# Altium PCB tinySniff.PcbDoc
Units mil, origin at the board's own origin, x right, y up, seen from the top; angles counter-clockwise.
Board outline 1900.96 x 1900.96 mil, 2 copper layers (Top Copper, Bottom Copper), stack 44.685 mil thick; 27 components, 11 nets, 102 pads, 21 vias.
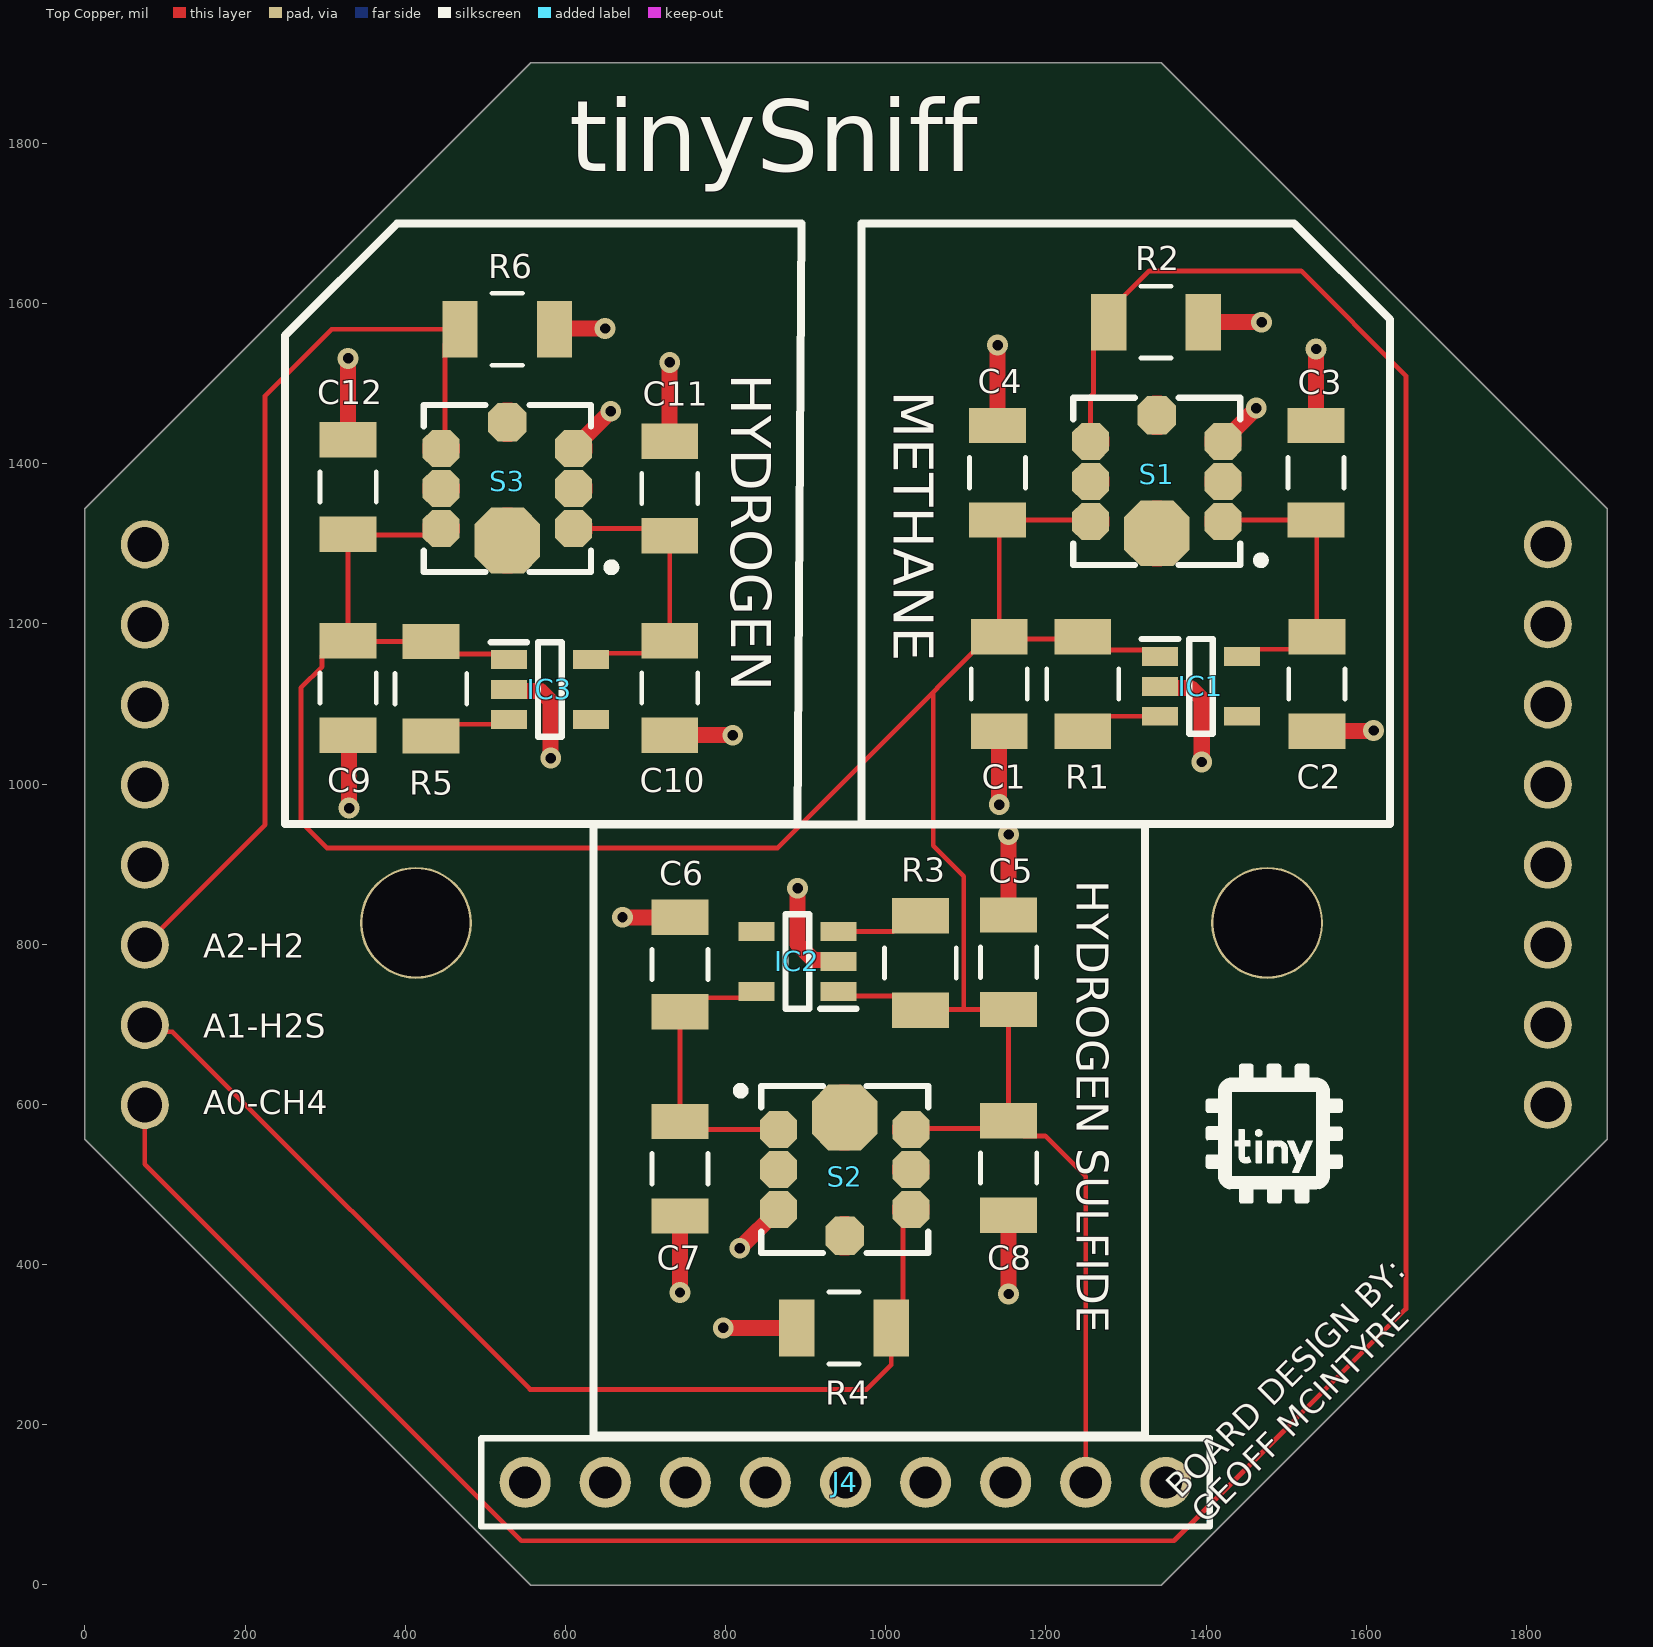
[diagram p0: Top Copper view]
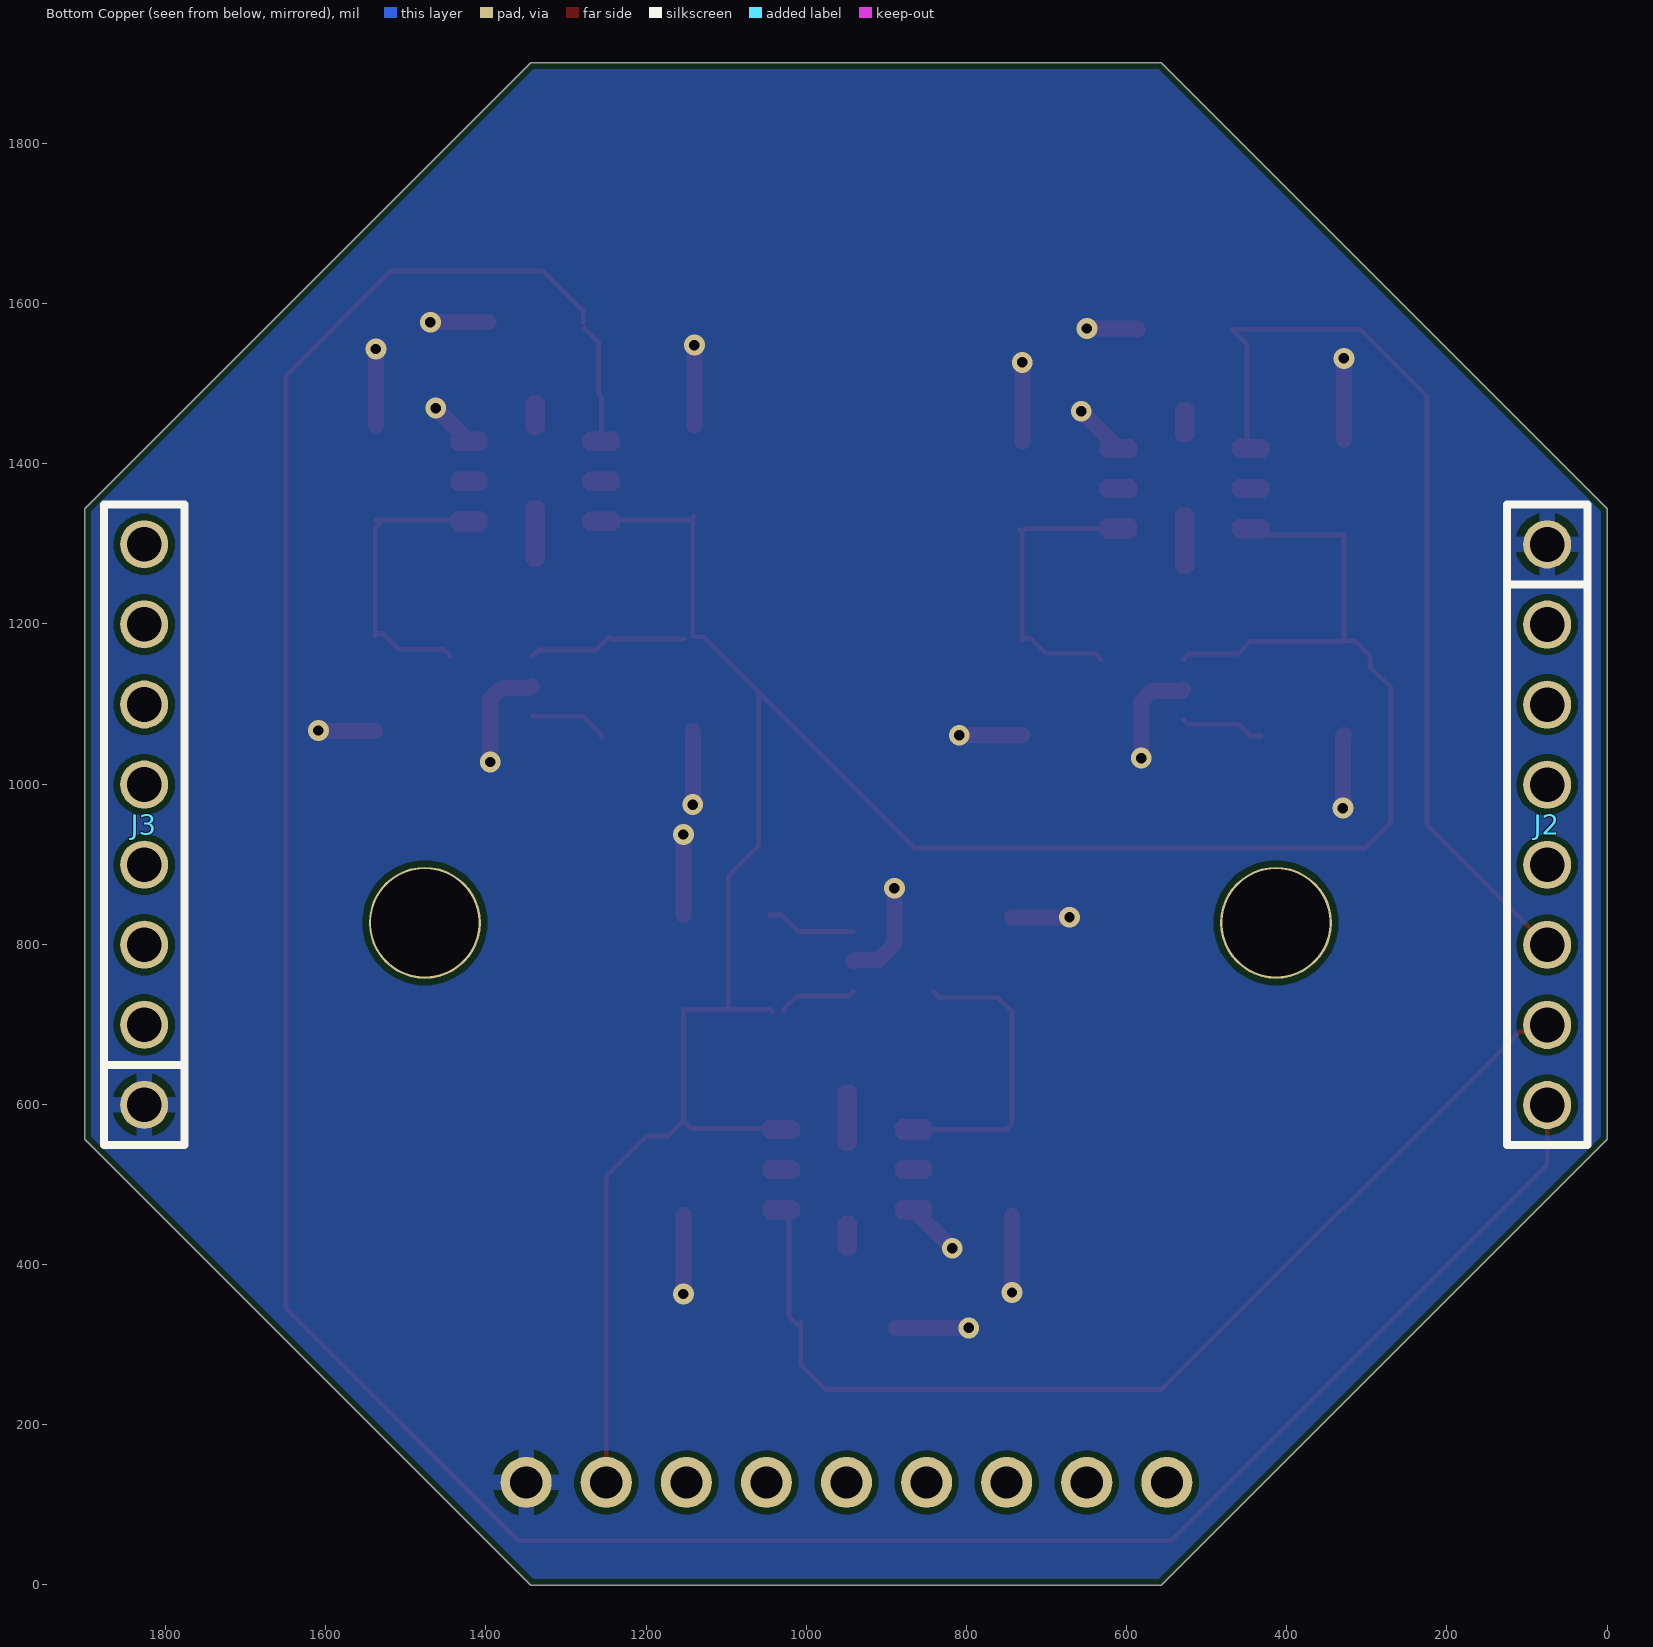
[diagram p1: Bottom Copper view, seen from below]
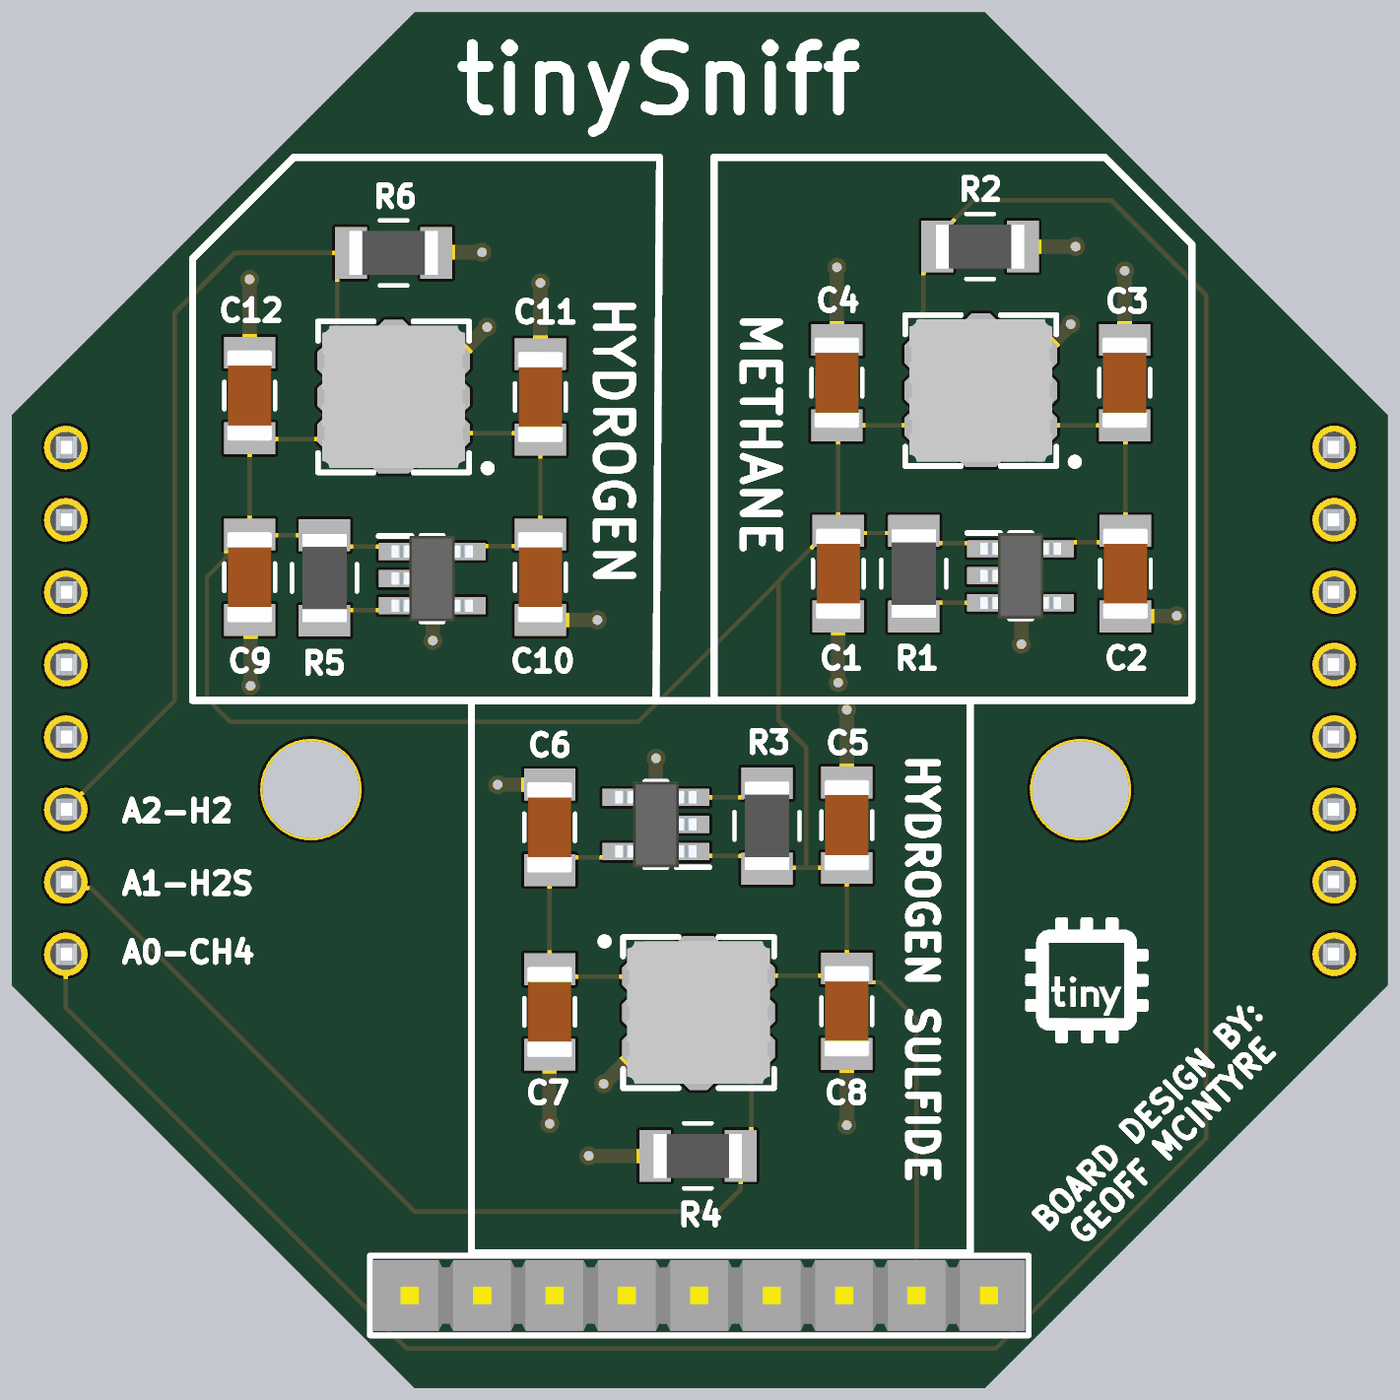
[diagram p2: 3D render of the assembled board from above, using the file's embedded part models]

## Layer stack, top to bottom
Top Mask: solder mask 0.5906, Solder Resist, Dk 3.8
Top Copper: signal copper 1.378
Core: core 41.9291, FR-4, Dk 4.5
Bottom Copper: signal copper 1.378
Bottom Mask: solder mask 0.5906, Solder Resist, Dk 3.8

## Board outline
-0.04,556.44 -0.04,1343.85 556.74,1900.62 1344.14,1900.62 1900.92,1343.85 1900.92,556.44 1344.14,-0.33 556.74,-0.33

## Design rules (kind name [scope] priority, off if disabled: settings)
BoardOutlineClearance [All] p1: gap=7.87 ignorepadtopadclearanceinfootprint=FALSE except(15.75: Arc-SplitBarrior Arc-SplitContinuation Track-SplitBarrior Track-SplitContinuation SMDPad-SplitBarrior SMDPad-SplitContinuation THPad-SplitBarrior THPad-SplitContinuation Via-SplitBarrior Via-SplitContinuation Fill-SplitBarrior Fill-SplitContinuation Poly-SplitBarrior Poly-SplitContinuation Region-SplitBarrior Region-SplitContinuation Text-SplitBarrior Text-SplitContinuation)
Clearance "Clearance Bottom Layer" [OnLayer('Bottom Layer')] p1: gap=8 ignorepadtopadclearanceinfootprint=TRUE except(10: Arc-Text Track-Text SMDPad-Text THPad-Text Via-Text Fill-Text Poly-Text Region-Text Text-Text)
Clearance "Clearance Top Layer" [OnLayer('Top Layer')] p2: gap=8 ignorepadtopadclearanceinfootprint=TRUE except(10: Arc-Text Track-Text SMDPad-Text THPad-Text Via-Text Fill-Text Poly-Text Region-Text Text-Text)
Clearance [All] p3: gap=7.87 ignorepadtopadclearanceinfootprint=FALSE except(3.5: Arc-Arc Arc-Track Arc-SMDPad Track-Track Track-SMDPad SMDPad-SMDPad; 5: Arc-Via Track-Via SMDPad-Via THPad-Via Via-Via; 10: Arc-Text Track-Text SMDPad-Text THPad-Text Via-Text Fill-Text Poly-Text Region-Text Text-Text)
HoleSize [All] p1: absolutevalues=TRUE maxlimit=248.03 minlimit=7.87 maxpercent=80.000 minpercent=20.000
MinimumAnnularRing [All] p1: minimumring=3
MinimumSolderMaskSliver [All] p1: minsoldermaskwidth=3.94
PolygonConnect PolygonConnect_1 [All] p1: thpad.connectstyle=Relief thpad.reliefconductorwidth=20 thpad.reliefentries=4 thpad.polygonreliefangle="90 Angle" thpad.airgapwidth=10 smdpad.connectstyle=Relief smdpad.reliefconductorwidth=20 smdpad.reliefentries=4 smdpad.polygonreliefangle="90 Angle" smdpad.airgapwidth=10 via.connectstyle=Direct via.reliefconductorwidth=20 via.reliefentries=4 via.polygonreliefangle="90 Angle" via.airgapwidth=10
RoutingCorners [All] p1: cornerstyle=Round minsetback=100 maxsetback=100
RoutingVias [All] p1: holewidth=13 width=26 viastyle="Through Hole" minholewidth=13 minwidth=26 maxholewidth=13 maxwidth=26
SilkToSilkClearance [All] p1: silktosilkclearance=3.94
SilkToSolderMaskClearance [IsPad] p1: minsilkscreentomaskgap=3.94 clearancetoexposedcopper=TRUE
SolderMaskExpansion SolderMaskExpansion_Via [IsVia] p1: expansion=4 istentingtop=TRUE
SolderMaskExpansion [All] p2: expansion=4 istentingtop=FALSE
SupplyNets "Schematic Supply Nets_5" [InNet('1.8V')] p1: voltage=0.000
SupplyNets "Schematic Supply Nets_3" [InNet('2.6V')] p2: voltage=0.000
SupplyNets "Schematic Supply Nets_2" [InNet('2.5V')] p3: voltage=0.000
SupplyNets "Schematic Supply Nets_1" [InNet('VCC')] p4: voltage=0.000
SupplyNets "Schematic Supply Nets_4" [InNet('GND')] p5: voltage=0.000
Width IMP [InNetClass('IMP')] p1: maxlimit=20 minlimit=10 preferedwidth=20 minimp=50.000000 maximp=50.000000 favimp=50.000000
Width [All] p2: maxlimit=100 minlimit=3.5 preferedwidth=6 minimp=50.000000 maximp=50.000000 favimp=50.000000
25 further rules are at their usual default settings.

## Components (designator, comment, footprint, x,y, rotation, side; value= is the part's Value field where it differs from the comment)
C1 "1uF" 1206_Passive_Capacitor 1141.73,1125 r90 top
C2 "1uF" 1206_Passive_Capacitor 1538.39,1125 r90 top
C3 "100nF" 1206_Passive_Capacitor 1537.4,1388.78 r270 top
C4 "100nF" 1206_Passive_Capacitor 1139.76,1388.78 r90 top
C5 "1uF" 1206_Passive_Capacitor 1153.54,777.56 r270 top
C6 "1uF" 1206_Passive_Capacitor 743.11,774.61 r270 top
C7 "100nF" 1206_Passive_Capacitor 743.11,519.69 r90 top
C8 "100nF" 1206_Passive_Capacitor 1153.54,520.67 r270 top
C9 "1uF" 1206_Passive_Capacitor 328.74,1120.08 r90 top
C10 "1uF" 1206_Passive_Capacitor 730.31,1120.08 r90 top
C11 "100nF" 1206_Passive_Capacitor 730.31,1369.09 r270 top
C12 "100nF" 1206_Passive_Capacitor 328.74,1371.06 r90 top
IC1 "AP2112K-2.6TRG1" SOT95P285X140-5N 1393.7,1122.05 r0 top
IC2 "AP2112K-1.8TRG1" SOT95P285X140-5N 889.76,778.54 r180 top
IC3 "AP2112K-2.5TRG1" SOT95P285X140-5N 580.71,1118.11 r0 top
J2 "PPTC081LFBN-RC" "8_PIN_100MIL - Female" 74.8,1299.21 r270 bottom locked
J3 "PPTC081LFBN-RC" "8_PIN_100MIL - Female" 1826.77,599.41 r90 bottom locked
J4 "HTSW-109-07-X-SJ" JM-9_HTSW-109-07-X-S 949.8,127.95 r0 top
R1 "100KOhm" 1206_Passive_Resitor 1246.06,1125 r270 top
R2 "4.7KOhm" 1206_Passive_Resitor 1337.6,1576.77 r0 top
R3 "100KOhm" 1206_Passive_Resitor 1043.31,776.57 r90 top
R4 "4.7KOhm" 1206_Passive_Resitor 947.83,320.87 r180 top
R5 "100KOhm" 1206_Passive_Resitor 432.09,1119.09 r270 top
R6 "4.7KOhm" 1206_Passive_Resitor 527.56,1567.91 r0 top
S1 "GM-402B" QFN127P500X500X155_HS-9N 1338.58,1377.95 r180 top
S2 "GM-602B" QFN127P500X500X155_HS-9N 948.82,518.7 r0 top
S3 "GMV-2021B" QFN127P500X500X155_HS-9N 527.56,1369.09 r180 top

## Footprints (in the part's own frame and the unit in brackets; to place one, negate y for a bottom-side part, rotate by r counter-clockwise, add the part's x,y. Pads: shape width x height; smd on the part's side, far side on the other; paste and mask are expansions set on the pad)
"8_PIN_100MIL - Female" [mil]
  round 60 hole 43.31: 1(0,0) 2(100,0) 3(200,0) 4(300,0) 5(400,0) 6(500,0) 7(600,0) 8(700,0)
  silkscreen extent -50,-50 750,50, body extent -60,-51 760,49, height 335
1206_Passive_Capacitor [mil]
  rect 44x71 smd: 1(-59,0) 2(59,0)
  silkscreen extent -19,-35 19,35, body extent -63,-31 63,32, height 50
1206_Passive_Resitor [mil]
  rect 44x71 smd: 1(-59,0) 2(59,0)
  silkscreen extent -19,-45 19,45, body extent -61,-31 61,31, height 26
JM-9_HTSW-109-07-X-S [mm]
  round 1.62 hole 1.02: 1(-10.16,0) 2(-7.62,0) 3(-5.08,0) 4(-2.54,0) 5(0,0) 6(2.54,0) 7(5.08,0) 8(7.62,0) 9(10.16,0)
  silkscreen extent -11.56,-1.4 11.56,1.4, body extent -11.43,-1.24 11.43,1.24, height 8.38
QFN127P500X500X155_HS-9N [mm] "QFN, 8-Leads, Body 5.00x5.00mm, Pitch 1.27mm, Thermal Pad 4.00x3.18mm, IPC Medium Density"
  oct 1.17x1.17 smd: 1(2.1,1.27) 2(2.1,0) 3(2.1,-1.27) 5(-2.1,-1.27) 6(-2.1,0) 7(-2.1,1.27)
  oct 1.23x1.23 smd: 4(0,-2.1)
  oct 2.08x2.08 smd: 8(0,1.65)
  Top Copper region: -0.3,0.76 -0.15,0.61 0.15,0.61 0.3,0.76 0.3,2.54 0.15,2.69 -0.15,2.69 -0.3,2.54
  Top Copper region: 2.535,0.97 2.685,1.12 2.685,1.42 2.535,1.57 1.665,1.57 1.515,1.42 1.515,1.12 1.665,0.97
  Top Copper region: 2.535,-0.3 2.685,-0.15 2.685,0.15 2.535,0.3 1.665,0.3 1.515,0.15 1.515,-0.15 1.665,-0.3
  Top Copper region: 2.535,-1.57 2.685,-1.42 2.685,-1.12 2.535,-0.97 1.665,-0.97 1.515,-1.12 1.515,-1.42 1.665,-1.57
  Top Copper region: -0.3,-2.565 -0.15,-2.715 0.15,-2.715 0.3,-2.565 0.3,-1.635 0.15,-1.485 -0.15,-1.485 -0.3,-1.635
  Top Copper region: -1.665,-1.57 -1.515,-1.42 -1.515,-1.12 -1.665,-0.97 -2.535,-0.97 -2.685,-1.12 -2.685,-1.42 -2.535,-1.57
  Top Copper region: -1.665,-0.3 -1.515,-0.15 -1.515,0.15 -1.665,0.3 -2.535,0.3 -2.685,0.15 -2.685,-0.15 -2.535,-0.3
  Top Copper region: -1.675,0.95 -1.515,1.11 -1.515,1.43 -1.675,1.59 -2.525,1.59 -2.685,1.43 -2.685,1.11 -2.525,0.95
  silkscreen extent -3.43,-2.65 2.65,2.65, body extent -2.5,-2.5 2.5,2.5, height 1.85
SOT95P285X140-5N [mm]
  rect 1.15x0.6 smd: 1(-1.3,0.95) 2(-1.3,0) 3(-1.3,-0.95) 4(1.3,-0.95) 5(1.3,0.95)
  silkscreen extent -1.88,-1.5 0.38,1.5, body extent -1.43,-1.5 1.43,1.5, height 1.4

## Part data
C1 C2 C5 C6 C9 C10: library part C_1uF_1206, "MULTILAYER CERAMIC CAPACITORS MLCC - SMD/SMT 1UF 50V 1206 ROHS", LCSC Part#=C1848, MFR Part #=CL31B105KBHNNNE, Digikey Link=https://www.digikey.com/product-detail/en/C1206C105M4RACTU/399-8150-1-ND/3471873/?itemSeq=304982366, Type=Basic
C3 C4 C7 C8 C11 C12: library part C_47nF_1206, "100nF ±5% 50V C0G 1206 Multilayer Ceramic Capacitors MLCC - SMD/SMT RoHS", LCSC Part#=C21812, MFR Part #=GRM31M5C1H473JA01L, Datasheet=https://datasheet.lcsc.com/lcsc/1810201313_Murata-Electronics-GRM31M5C1H473JA01L_C21812.pdf, Type=Extended
IC1 IC3: library part CMP-031-00006-1, "600mA 1.8V LDO Regulator Enable SOT23-5", Arrow Part Number=AP2112K-1.8TRG1, Manufacturer_Name="Diodes Incorporated", Mouser Part Number=621-AP2112K-1.8TRG1, Arrow Price/Stock=https://www.arrow.com/en/products/ap2112k-1.8trg1/diodes-incorporated?region=nac, Datasheet Link=https://www.diodes.com/assets/Datasheets/AP2112.pdf, Design Item ID=AP2112K-1.8TRG1, Height=1.4mm, Manufacturer_Part_Number=AP2112K-1.8TRG1, Mouser Price/Stock=https://www.mouser.co.uk/ProductDetail/Diodes-Incorporated/AP2112K-1.8TRG1?qs=x6A8l6qLYDBx1xhw8AX2cw%3D%3D, Source=SamacSys.SchLib
IC2: library part CMP-031-00006-1, "600mA 1.8V LDO Regulator Enable SOT23-5", Manufacturer_Name="Diodes Incorporated", Mouser Part Number=621-AP2112K-1.8TRG1, Arrow Part Number=AP2112K-1.8TRG1, Arrow Price/Stock=https://www.arrow.com/en/products/ap2112k-1.8trg1/diodes-incorporated?region=nac, Datasheet Link=https://www.diodes.com/assets/Datasheets/AP2112.pdf, Design Item ID=AP2112K-1.8TRG1, Height=1.4mm, Manufacturer_Part_Number=AP2112K-1.8TRG1, Mouser Price/Stock=https://www.mouser.co.uk/ProductDetail/Diodes-Incorporated/AP2112K-1.8TRG1?qs=x6A8l6qLYDBx1xhw8AX2cw%3D%3D, Source=SamacSys.SchLib
J2 J3: library part JF_8_PIN_FEMALE, "8 Position Header Connector 0.100\" (2.54mm) Through Hole Tin", LCSC Part#=C27438, Digikey Link=https://www.digikey.com/product-detail/en/PPTC081LFBN-RC/S7006-ND/810147/?itemSeq=304982354, MFR Part #=PPTC081LFBN-RC, Type=Extended
J4: library part JM_9_PIN_MALE, "2.54mm Black 1x9P Straight,P=2.54mm Pin Headers", LCSC Part#=C2894932, MFR Part #=PZ254-1-09-Z-8.5, MFR PN=HTSW-109-07-X-SJ
R1 R3 R5: library part R_100KOhm_1206, "100kΩ ±1% 0.25W ±100ppm/℃ 1206 Chip Resistor - Surface Mount RoHS", LCSC Part#=C17900, MFR Part #=1206W4F1003T5E, Datasheet=https://datasheet.lcsc.com/lcsc/1810301421_UNI-ROYAL-Uniroyal-Elec-1206W4F1003T5E_C17900.pdf, Type=Basic
R2 R4 R6: library part R_4.7k_1206, "4.7kΩ ±1% 0.25W ±100ppm/℃ 1206 Chip Resistor - Surface Mount RoHS", LCSC Part#=C17936, MFR Part #=1206W4F4701T5E, Datasheet=https://datasheet.lcsc.com/lcsc/1810301414_UNI-ROYAL-Uniroyal-Elec-1206W4F4701T5E_C17936.pdf, Type=Basic
S1 S2 S3: library part CMP-010-00024-1, "Generic MEMS footprint for GM series devices from Winsen"

## Free pads (board coordinates)
  round 139.76 hole 133.86: 2(413.39,826.77) 5(1476.38,826.77)

## Via types
v1: diameter 26, hole 13, Top Copper to Bottom Copper, tented both sides, 21 vias

## Nets (pads, with @x,y where several pads share a name; then routed paths per layer and width w, separated by ;. In a path a pad name is that pad's centre, name@x,y a point inside that pad or via, vN(x,y) a via of type N, cw(c..) or ccw(c..) an arc to the next point about the centre after c; other vN are vias at no path point)
1.8V: C6.2 C7.2 IC2.5 S2.7 | length 371.9
  Top Copper w6: C7.2@743.11,575.79 750.2,568.7 S2.7 ; C7.2 C6.2 760.77,733.27 833.66,733.27 IC2.5@841.54,741.14
2.5V: C10.2 C11.2 IC3.5 S3.7 | length 367.8
  Top Copper w6: S3.7 726.18,1319.09 C11.2@727.36,1317.91 ; S3.7@616.14,1323.82 S3.7@616.14,1327.42 ; IC3.5 639.76,1163.39 701.12,1163.39 719.82,1182.09 C10.2@727.36,1182.09 ; C10.2 C11.2 730.31,1314.96 C11.2@733.27,1317.91
2.6V: C2.2 C3.2 IC1.5 S1.7 | length 368.7
  Top Copper w6: S1.7@1417.32,1329.72 1417.38,1329.78 C3.2 ; IC1.5 1453.69,1168.26 1467.99,1168.26 1468.03,1168.31 1509.19,1168.31 1528.88,1187.99 C2.2@1537.4,1187.99 ; C3.2@1532.48,1325.79 1538.39,1319.88 C2.2
CH4: J2.8 R2.1 S1.3 | length 3739.3
  Top Copper w6: J2.8 74.8,525.2 545,55 1360,55 1649.61,344.61 1649.61,1509.84 1518.7,1640.75 1329.07,1640.75 1278.6,1590.27 R2.1 ; S1.3 1255.91,1484.27 1259.6,1487.96 1259.6,1551.92 R2.1@1277.56,1569.88
GND: C1.1 C2.1 C3.1 C4.2 C5.1 C6.1 C7.1 C8.2 C9.1 C10.1 C11.1 C12.2 IC1.2 IC2.2 IC3.2 J2.1 J3.1 J4.9 R2.2 R4.2 R6.2 S1.5 S2.5 S3.5 | length 1912.5
  Top Copper w20: C9.1 330,1059.82 v1(330,970) ; C12.2 v1(328.74,1531.5) ; IC3.2 531.34,1116.3 568.74,1116.3 581.69,1103.35 v1(581.69,1032.48) ; R6.2 587.54,1568.9 v1(649.61,1568.9) ; S3.5 v1(656.69,1465.55) ; v1(671.39,833.61) C6.1 ; C10.1 v1(809,1061.08) ; C11.1 v1(730.31,1526.57) ; v1(743.11,365.16) C7.1 ; v1(797.24,320.87) R4.2 ; v1(817.72,420.28) S2.5 ; v1(890,870) 890,800 909.65,780.35 939.13,780.35 IC2.2 ; C4.2 v1(1139.76,1548.23) ; v1(1141.73,974.41) C1.1 ; v1(1153.54,363.19) C8.2 ; C5.1 v1(1153.54,937.01) ; IC1.2 1344.33,1120.24 1380.75,1120.24 1394.68,1106.3 v1(1394.68,1027.56) ; R2.2 v1(1469.49,1576.77) ; S1.5 v1(1462.8,1469.49) ; C3.1 v1(1537.4,1543.31) ; C2.1 1538.85,1066.46 1608.79,1066.46 v1(1609.25,1066.93)
H2: J2.6 R6.1 S3.3 | length 1184.2
  Top Copper w6: J2.6@75.79,800.2 225,949.41 225,1484.84 308.07,1567.91 R6.1 449.56,1548.91 449.56,1423.97 S3.3@443.9,1418.31
H2S: J2.7 R4.1 S2.3 | length 1353.7
  Top Copper w6: J2.7 83.39,690.63 109.37,690.63 555.91,244.09 976.38,244.09 1006.89,274.61 R4.1@1006.89,320.92 ; R4.1@1006.89,327.76 R4.1@1006.89,320.92 ; S2.3@1034.45,472.44 1021.65,459.65 1021.65,335.69 R4.1@1006.89,320.92
  Bottom Copper w6: J2.7@77.76,697.83 J2.7@77.76,702.17
NetIC1_3: IC1.3 R1.2 | length 99.9
  Top Copper w6: R1.2@1255.91,1058.07 1255.91,1061.99 1278.56,1084.65 IC1.3
NetIC2_3: IC2.3 R3.2 | length 113.9
  Top Copper w6: IC2.3 1010.18,815.94 1030.85,836.61 R3.2@1046.26,836.61
NetIC3_3: IC3.3 R5.2 | length 106
  Top Copper w6: R5.2 445.59,1060.09 460.3,1074.8 523.62,1074.8 IC3.3
VCC: C1.2 C4.1 C5.2 C8.1 C9.2 C12.1 IC1.1 IC2.1 IC3.1 J4.8 R1.1 R3.1 R5.1 S1.1 S2.1 S3.1 | length 3575.9
  Top Copper w6: C9.2@328.74,1178.09 R5.1 445.59,1178.09 461.28,1162.4 522.64,1162.4 IC3.1 ; C9.2 315.24,1179.08 296.24,1160.08 296.24,1146.63 269.68,1120.08 269.68,952.76 302.17,920.28 865.16,920.28 1059.39,1114.51 ; C9.2@328.74,1179.13 C12.1@328.74,1311.02 ; C12.1 C12.1@328.74,1311.02 ; S3.1 436.81,1311.02 C12.1@328.74,1311.02 ; IC2.1 946.85,735.24 1012.15,735.24 1027.56,719.82 R3.1@1027.56,716.54 ; S2.1@1037.4,569.88 1143.76,569.88 C8.1 ; R3.1@1042.32,715.55 1045.33,718.56 1097.44,718.56 ; 1063.65,1119.42 1128.23,1184 C1.2 C4.1@1141.73,1329.78 ; 1063.98,1119.09 1059.39,1114.51 ; C4.1@1140.75,1334.65 1141.73,1333.66 C4.1@1141.73,1329.78 ; C1.2@1153.54,1181.1 1243.17,1181.1 R1.1 1262.74,1167.32 1334.65,1167.32 IC1.1 ; J4.8@1250,125 1249.8,125.2 J4.8 1249.8,510.2 1199.33,560.67 1172.54,560.67 C8.1 ; S1.1@1256.89,1327.76 1254.87,1329.78 C4.1@1141.73,1329.78 ; 1059.39,1114.51 1059.39,922.89 1097.44,884.84 1097.44,718.56 ; 1097.44,718.56 C5.2 C8.1
pads on no net: IC1.4 IC2.4 IC3.4 J2.2 J2.3 J2.4 J2.5 J3.2 J3.3 J3.4 J3.5 J3.6 J3.7 J3.8 J4.1 J4.2 J4.3 J4.4 J4.5 J4.6 J4.7 S1.2 S1.4 S1.6 S1.8 S2.2 S2.4 S2.6 S2.8 S3.2 S3.4 S3.6 S3.8

## Polygon pours and split planes (outlines as drawn)
GND on Bottom Copper "GND_L02_P012" (solid, pour order 12): 0,0 0,1900 1900,1900 1900,0

## Silkscreen, mask and mechanical layers (free items; w line width, h text height)
Top Overlay:
  drawing of 20 lines, arcs and shapes, not listed
  text "tinySniff" at 605,1764.99 h90
  text "HYDROGEN" at 807.24,1512.64 h50 r270
  text "METHANE" at 1010,1490.98 h50 r270
  text "HYDROGEN SULFIDE" at 1238.35,879.76 h40 r270
  text "A2-H2" at 148,783 h30
  text "A1-H2S" at 148,683 h30
  text "A0-CH4" at 148,588 h30
  text "BOARD DESIGN BY:  / GEOFF MCINTYRE" at 1399.79,74.79 h30 r45
Mechanical 1:
  lines w0.5: 556.74,-0.33 1344.14,-0.33